# EAGLE board midipal-v02 (EAGLE 5.09)
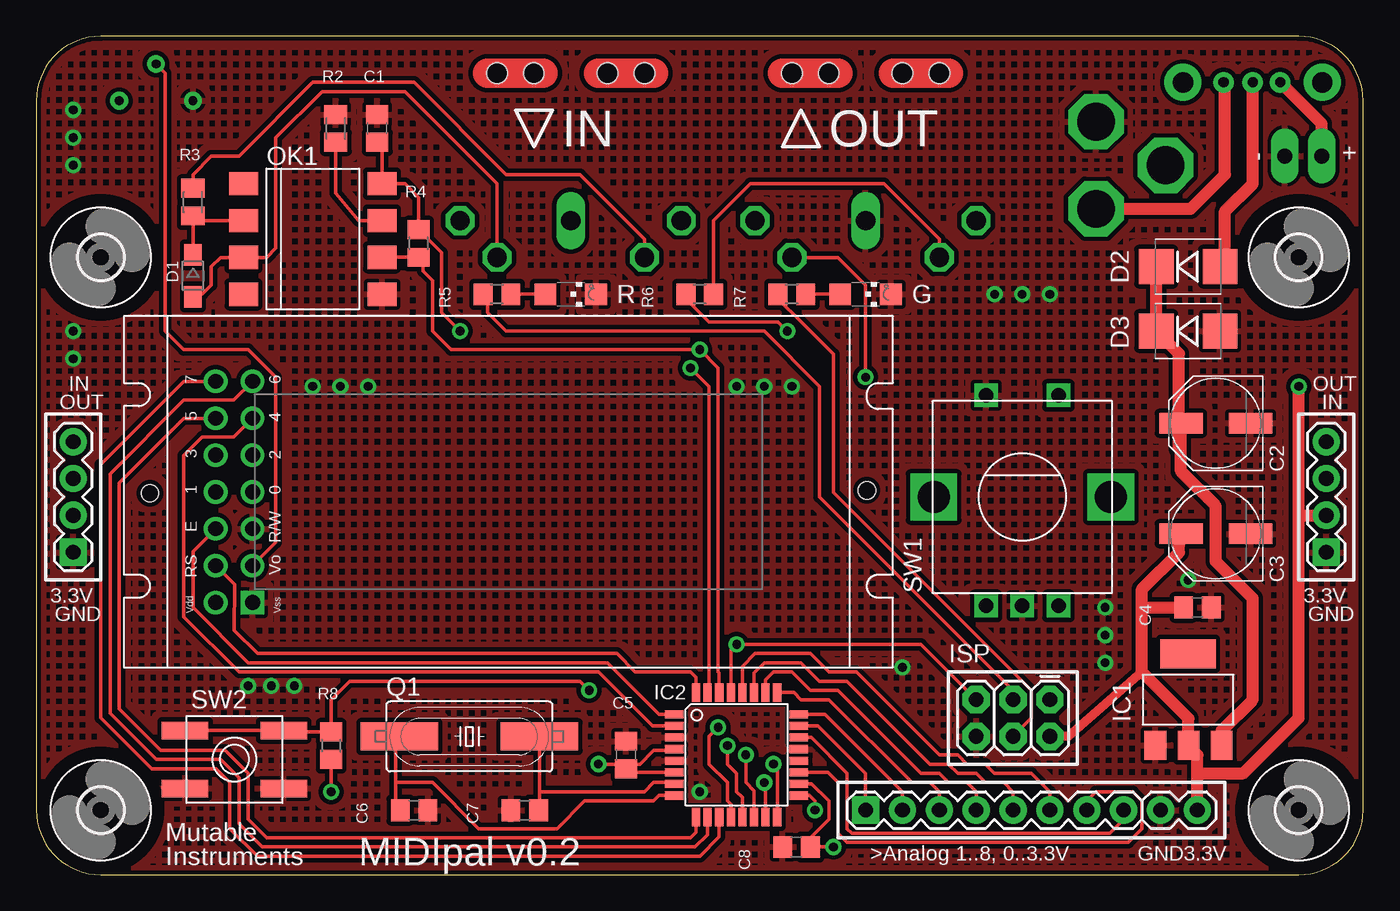
[diagram p0: board, top side]
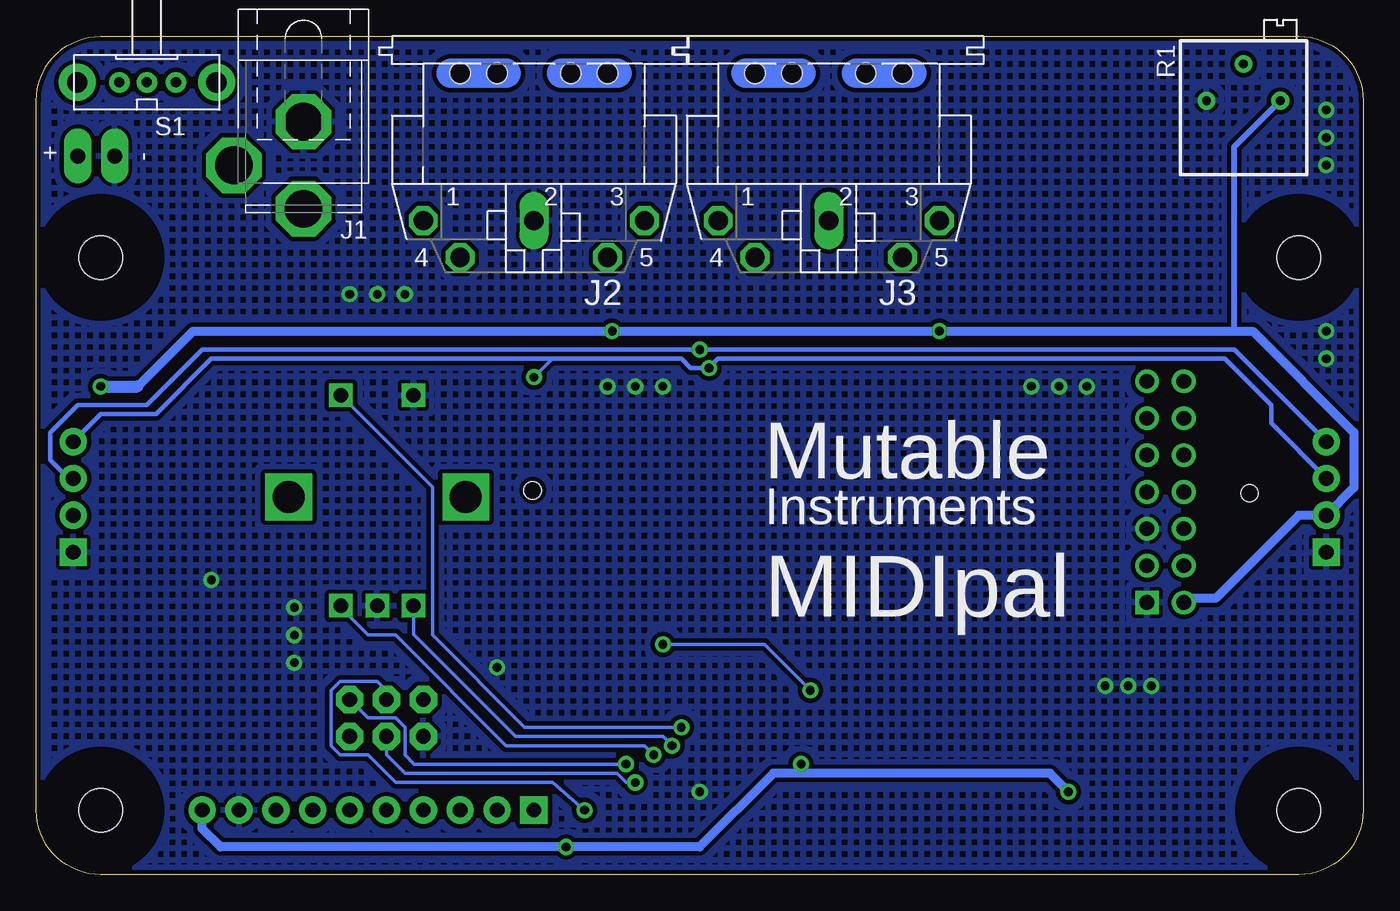
[diagram p1: board, bottom side, seen from below]

Size 91.44 x 57.79 mm. Coordinates in mm from the lower left corner, seen from the top.
Outline: 4.45,57.79 arc90 0,53.34 0,4.45 arc90 4.45,0 87,0 arc90 91.44,4.45 91.44,53.34 arc90 87,57.79 4.45,57.79
Copper layers (1*16): Top 0.035mm / dielectric 1.5mm / Bottom 0.035mm
Design rules "SparkFun": minimum track width 8mil, minimum drill 20mil, track to track 8mil, track to pad 8mil, pad to pad 8mil, via to via 8mil, smd to smd 8mil, copper to edge 10mil, drill to drill 8mil, minimum pad ring 12mil, minimum via ring 10mil, stop-mask expansion 4mil, vias tented up to drill 25mil, thermal gap 10mil

## Footprints (pad centres in the part's own frame; a part is rotated, then mirrored left to right if it is on the bottom)
C0805 = smd 1.3 x 1.5: 1 -0.95,0; 2 0.95,0
PANASONIC_D = smd 3 x 1.4: + 2.4,0; - -2.4,0
SOD323-W = smd 1.5 x 1.2: A 1.45,0; C -1.45,0
SMB-DIODE = smd 2.4 x 2.4: A 2.2,0; C -2.2,0
CHIPLED_1206 = smd 1.5 x 1.5: A 0,-1.75; C 0,1.75
SOT223 = smd 1.499 x 2.007: 1 -2.261,-3.15; 2 0.025,-3.15; 3 2.311,-3.15 | smd 3.81 x 2.007: 4 0,3.15
TQFP32-08 = smd 1.27 x 0.559: 1 -4.293,2.8; 2 -4.293,2; 3 -4.293,1.2; 4 -4.293,0.4; 5 -4.293,-0.4; 6 -4.293,-1.2; 7 -4.293,-2; 8 -4.293,-2.8; 17 4.293,-2.8; 18 4.293,-2; 19 4.293,-1.2; 20 4.293,-0.4; 21 4.293,0.4; 22 4.293,1.2; 23 4.293,2; 24 4.293,2.8 | smd 0.559 x 1.27: 9 -2.8,-4.293; 10 -2,-4.293; 11 -1.2,-4.293; 12 -0.4,-4.293; 13 0.4,-4.293; 14 1.2,-4.293; 15 2,-4.293; 16 2.8,-4.293; 25 2.8,4.293; 26 2,4.293; 27 1.2,4.293; 28 0.4,4.293; 29 -0.4,4.293; 30 -1.2,4.293; 31 -2,4.293; 32 -2.8,4.293
2X3 = drill 1.016 pad 1.88 octagon: 1 0,0; 2 0,2.54; 3 2.54,0; 4 2.54,2.54; 5 5.08,0; 6 5.08,2.54
SPC4078_BIG_HOLES = drill 2.6 pad 3.81 octagon: 1 -0.46,0; 2 2.54,-4.8; 3 5.54,0
MAB5SH = drill 1.321 octagon: 1 7.62,7.62; 3 -7.62,7.62; 4 5.08,10.16; 5 -5.08,10.16 | drill 1.321 long: 2 0,7.62 | hole 1.4: 2.54,-2.54; -2.54,-2.54; -5.08,-2.54; 5.08,-2.54
1X02_LONGPADS = drill 1.016 pad 1.88 long: 1 0,0; 2 2.54,0
1X04 = drill 1.016 pad 1.88 square: 1 0,0 | drill 1.016 pad 1.88 round: 2 2.54,0; 3 5.08,0; 4 7.62,0
1X08 = drill 1.016 pad 1.88 square: 1 0,0 | drill 1.016 pad 1.88 round: 2 2.54,0; 3 5.08,0; 4 7.62,0; 5 10.16,0; 6 12.7,0; 7 15.24,0; 8 17.78,0
1X02 = drill 1.016 pad 1.88 round: 1 0,0; 2 2.54,0
LCD_MODULE_1X8 = drill 1.016 square: 1 8.87,4.47 | drill 1.016 round: 2 6.33,4.47; 3 8.87,7.01; 4 6.33,7.01; 5 8.87,9.55; 6 6.33,9.55; 7 8.87,12.09; 8 6.33,12.09; 9 8.87,14.63; 10 6.33,14.63; 11 8.87,17.17; 12 6.33,17.17; 13 8.87,19.71; 14 6.33,19.71 | hole 1.2: 1.8,12; 51.2,12.2
DIL8-SMD = smd 1.6 x 2: 1 -3.81,-4.77; 2 -1.27,-4.77; 3 1.27,-4.77; 4 3.81,-4.77; 5 3.81,4.77; 6 1.27,4.77; 7 -1.27,4.77; 8 -3.81,4.77
HC49UP = smd 5.334 x 1.93: 1 -4.826,0; 2 4.826,0
RTRIM3296P = drill 0.61 round: 1 0,-2.54; 2 2.54,0; 3 0,2.54
M0805 = smd 1.3 x 1.6: 1 -0.95,0; 2 0.95,0
R0805 = smd 1.3 x 1.5: 1 -0.95,0; 2 0.95,0
EG1213 = drill 0.7 pad 1.422 round: 1 -2,0; 2 0,0; 3 1.9,0 | drill 1.4 pad 2.54 round: MT1 -4.8,0; MT2 4.8,0
ALPS_EC12E_SW = drill 1 square: A -2.5,-7.5; B 2.5,-7.5; C 0,-7.5; D -2.5,7; E 2.5,7 | drill 2.2 square: GND1 -6.1,0; GND2 6.1,0
EVQ-Q2 = smd 3.2 x 1.2: A -3.4,-2; A' 3.4,-2; B -3.4,2; B' 3.4,2
3,0 = hole 3: 0,0

## Placement (x,y rotation side)
C1  100n  [C0805]  23.5,51.44 90 top
C2  100u  [PANASONIC_D]  81.28,31.11 180 top
C3  100u  [PANASONIC_D]  81.28,23.49 180 top
C4  100n  [C0805]  80.01,18.41 0 top
C5  100n  [C0805]  40.64,8.26 90 top
C6  20p  [C0805]  26.04,4.45 180 top
C7  20p  [C0805]  33.65,4.45 0 top
C8  100n  [C0805]  52.39,1.91 180 top
D1  1N4148  [SOD323-W]  10.79,41.27 270 top
D2  [SMB-DIODE]  79.38,41.91 0 top
D3  [SMB-DIODE]  79.38,37.47 0 top
G  [CHIPLED_1206]  57.15,40.01 270 top
IC1  LM1117-3.3  [SOT223]  79.38,12.06 0 top
IC2  ATMEGA328  [TQFP32-08]  48.26,8.26 0 top
ISP  AVR_ISP  [2X3]  69.85,12.06 180 top
J1  [SPC4078_BIG_HOLES]  73.03,51.44 270 bottom
J2  MIDI  [MAB5SH]  57.15,52.71 180 bottom
J3  MIDI  [MAB5SH]  36.83,52.71 180 bottom
JP1  [1X02_LONGPADS]  86.04,49.53 0 top
JP2  [1X04]  2.54,22.22 90 top
JP3  [1X04]  88.9,22.22 90 top
JP4  [1X08]  57.15,4.45 0 top
JP5  [1X02]  77.47,4.45 0 top
LCD1  LCD_MODULE_NO_BKL  [LCD_MODULE_1X8]  6.03,14.29 0 top
OK1  6N138  [DIL8-SMD]  19.05,43.82 270 top
Q1  20MHz  [HC49UP]  29.84,9.53 0 top
R  [CHIPLED_1206]  36.83,40.01 270 top
R1  5k  [RTRIM3296P]  8.26,53.34 90 bottom
R2  4.7k  [M0805]  20.64,51.44 270 top
R3  220  [M0805]  10.79,46.36 270 top
R4  220  [R0805]  26.35,43.5 90 top
R5  100  [R0805]  31.75,40.01 180 top
R6  100  [R0805]  45.72,40.01 180 top
R7  100  [R0805]  52.07,40.01 180 top
R8  10k  [R0805]  20.32,8.89 270 top
S1  EG1213  [EG1213]  83.82,54.61 180 bottom
SW1  Encoder  [ALPS_EC12E_SW]  67.95,26.04 0 top
SW2  EVQQ2  [EVQ-Q2]  13.65,7.94 0 top
U$1  [3,0]  4.45,42.55 0 top
U$2  [3,0]  87,42.55 0 top
U$3  [SARASWATI]  57.15,17.78 0 bottom
U$4  [3,0]  4.45,4.45 0 top
U$5  [3,0]  87,4.45 0 top

## Library data of the parts
C1-C8 R1-R8 = rcl
D1 = diode
D2 D3 IC2 ISP JP1-JP5 = SparkFun
G R = led
IC1 = burr-brown
J1 = con-jack2
J2 J3 = og-midi
LCD1 = og-lcd
OK1 = og-optocouplers
Q1 = crystal
S1 SW2 = adafruit
SW1 = switch-alps
U$1 U$2 U$4 U$5 = holes
U$3 = og-pcb-art

## Nets
GND: C1.2 C2.- C3.- C4.2 C5.2 C6.1 C7.1 C8.2 D3.A G.C IC1.1 IC2.3 IC2.5 IC2.21 ISP.6 J1.1 J2.2 JP1.1 JP2.1 JP3.1 JP5.1 LCD1.1 LCD1.5 OK1.5 R1.3 R2.1 R.C SW1.C SW1.D SW2.A SW2.A'
LCD_DATA4: IC2.2 LCD1.11
LCD_DATA5: IC2.9 LCD1.12
LCD_DATA6: IC2.10 LCD1.13
LCD_DATA7: IC2.11 LCD1.14
LCD_EN: IC2.1 LCD1.6
LCD_RS: IC2.32 LCD1.4
MIDI_IN: IC2.30 JP2.4 JP3.3 OK1.6 R4.1
MIDI_OUT: IC2.31 J2.5 JP2.3 JP3.4
MISO: IC2.16 ISP.1
MOSI: IC2.15 ISP.4 R7.2
N$1: J1.3 S1.1
N$2: C2.+ D2.C D3.C IC1.3
N$3: IC2.23 JP4.1
N$4: D2.A S1.2
N$5: IC2.24 JP4.2
N$6: IC2.25 JP4.3
N$7: IC2.26 JP4.4
N$8: IC2.27 JP4.5
N$9: IC2.28 JP4.6
N$10: IC2.19 JP4.7
N$11: IC2.22 JP4.8
N$12: G.A R7.1
N$13: OK1.7 R2.2
N$14: R5.1 R.A
N$15: IC2.14 SW1.B
N$16: IC2.13 SW1.A
N$17: IC2.12 SW1.E
N$18: LCD1.3 R1.2
N$28: D1.C OK1.2 R3.2
N$68: J2.4 R6.1
N$72: J3.4 R3.1
N$73: D1.A J3.5 OK1.3
N$82: C6.2 IC2.8 Q1.1
N$83: C7.2 IC2.7 Q1.2
RESET: IC2.29 ISP.5 R8.1 SW2.B SW2.B'
SCK: IC2.17 ISP.3 R5.2
VCC: C1.1 C3.+ C4.1 C5.1 C8.1 IC1.2 IC2.4 IC2.6 IC2.18 ISP.2 JP2.2 JP3.2 JP5.2 LCD1.2 OK1.8 R1.1 R4.2 R6.2 R8.2
VIN: JP1.2 S1.3

## Tracks (layer width: path | path; a pad name or v marks a point on that pad's centre or on a via)
GND  (via drill 0.6)
  other vias: 79.38,20.32 45.72,5.71 59.69,14.29 73.66,18.41 73.66,16.51 73.66,14.61 14.61,13.02 16.19,13.02 17.78,13.02 48.26,33.66 2.54,52.71 2.54,50.8 2.54,48.9 2.54,37.47 2.54,35.56 66.04,40.01 67.95,40.01 69.85,40.01 22.86,33.66 20.96,33.66 19.05,33.66 50.16,33.66 52.07,33.66
  pour Top (isolate 0.305, hatched): -1.27,59.05 -1.27,-0.64 92.71,-0.64 92.71,59.05
  pour Bottom (isolate 0.305, hatched): -1.27,-0.64 92.71,-0.64 92.71,59.05 -1.27,59.05
LCD_DATA4
  Top 0.254: LCD1.11 13.61,30.16 11.43,30.16 10.16,28.89 10.16,17.78 13.97,13.97 38.73,13.97 42.45,10.26 IC2.2
LCD_DATA5
  Top 0.254: LCD1.12 12.34,31.43 10.16,31.43 5.71,26.99 5.71,11.43 8.57,8.57 13.02,8.57 14.61,6.99 14.61,3.81 15.88,2.54 45.08,2.54 45.46,2.92 IC2.9
LCD_DATA6
  Top 0.254: LCD1.13 13.61,32.7 10.16,32.7 5.08,27.62 5.08,11.11 8.26,7.94 12.7,7.94 13.97,6.67 13.97,3.49 15.56,1.91 45.4,1.91 46.26,2.76 IC2.10
LCD_DATA7
  Top 0.254: LCD1.14 11.7,33.97 10.16,33.97 4.45,28.26 4.45,10.79 7.94,7.3 12.38,7.3 13.34,6.35 13.34,3.17 15.24,1.27 45.72,1.27 47.06,2.61 IC2.11
LCD_EN
  Top 0.254: LCD1.6 10.79,22.27 10.79,18.41 14.61,14.61 39.37,14.61 42.92,11.05 IC2.1
LCD_RS
  Top 0.254: LCD1.4 13.66,20 13.65,16.83 15.24,15.24 40,15.24 41.27,13.97 45.08,13.97 45.46,13.6 IC2.32
MIDI_IN  (via drill 0.6)
  Top 0.254: OK1.6 R4.1 | R4.1 | R4.1 26.67,42.23 26.67,41.59 27.3,40.96 27.3,37.47 28.57,36.2 v45.72,36.2 46.99,34.93 46.99,13.97 47.06,13.9 IC2.30
  Bottom 0.305: JP2.4 8.89,36.2 v45.72,36.2 80.01,36.2 83.82,32.39 88.58,32.39 90.49,30.48 90.49,28.57 89.22,27.3 JP3.3
MIDI_OUT  (via drill 0.6)
  Top 0.254: IC2.31 46.35,12.64 46.35,33.66 v45.08,34.93 | J2.5 55.24,42.55 57.15,40.64 v57.15,34.29
  Bottom 0.254: 55.88,35.56 v57.15,34.29
  Bottom 0.305: JP2.3 6.35,31.11 6.35,32.39 9.53,35.56 44.45,35.56 v45.08,34.93 46.35,34.93 46.99,35.56 55.88,35.56 79.38,35.56 83.19,31.75 87,31.75 JP3.4
MISO  (via drill 0.6)
  Top 0.254: v50.8,7.62 51.06,7.36 IC2.16
  Bottom 0.254: ISP.1 68.58,10.79 66.67,10.79 66.04,10.16 66.04,8.26 65.41,7.62 v50.8,7.62
MOSI  (via drill 0.6)
  Top 0.254: ISP.4 68.58,10.79 68.58,12.7 54.93,26.35 54.93,35.88 52.39,38.41 51.43,39.37 R7.2 | v50.16,6.35 50.26,6.25 IC2.15
  Bottom 0.254: ISP.4 67.31,8.26 66.04,6.99 51.43,6.99 50.8,6.35 v50.16,6.35
N$1
  Top 0.813: S1.1 81.92,54.52 81.92,48.26 79.55,45.9 J1.3
N$2
  Top 0.813: IC1.3 81.69,9.93 83.82,12.06 83.82,19.05 81.28,21.59 81.28,25.4 78.88,27.8 C2.+ 78.74,29.35 78.74,35.9 D3.C D2.C
N$3
  Top 0.254: JP4.1 57.15,6.99 53.88,10.26 IC2.23
N$4
  Top 0.813: D2.A 81.92,41.62 81.92,45.72 83.82,47.62 S1.2
N$5
  Top 0.254: JP4.2 59.69,5.71 54.35,11.05 IC2.24
N$6
  Top 0.254: JP4.3 62.23,5.71 61.59,6.35 60.32,6.35 54.61,12.06 52.7,12.06 52.22,12.55 IC2.25
N$7
  Top 0.254: JP4.4 64.77,5.71 64.14,6.35 62.87,6.35 62.23,6.99 60.96,6.99 55.24,12.7 53.34,12.7 52.07,13.97 50.8,13.97 50.26,13.43 IC2.26
N$8
  Top 0.254: JP4.5 67.31,5.71 66.67,6.35 65.41,6.35 64.77,6.99 63.5,6.99 62.87,7.62 61.59,7.62 55.88,13.34 53.97,13.34 52.7,14.61 50.16,14.61 49.46,13.9 IC2.27
N$9
  Top 0.254: JP4.6 69.85,5.71 68.58,6.99 66.04,6.99 65.41,7.62 64.14,7.62 63.5,8.26 62.23,8.26 56.51,13.97 54.61,13.97 53.34,15.24 49.53,15.24 48.66,14.37 IC2.28
N$10
  Top 0.254: JP4.7 72.39,5.08 73.03,5.71 75.56,5.71 76.2,5.08 76.2,3.17 75.25,2.22 55.88,2.22 55.24,2.86 55.24,6.35 54.54,7.06 IC2.19
N$11
  Top 0.254: JP4.8 74.93,3.81 73.98,2.86 56.2,2.86 55.88,3.17 55.88,6.99 53.41,9.46 IC2.22
N$12
  Top 0.254: R7.1 G.A
N$13
  Top 0.254: R2.2 20.64,46.99 22.23,45.09 OK1.7
N$14
  Top 0.254: R5.1 R.A
N$15  (via drill 0.6)
  Top 0.254: v48.89,8.26 48.89,6.35 49.46,5.79 IC2.14
  Bottom 0.254: v48.89,8.26 49.53,8.89 59.05,8.89 66.67,16.51 68.58,16.51 70.45,18.38 SW1.B
N$16  (via drill 0.6)
  Top 0.254: v47.62,8.89 47.62,7.62 48.26,6.99 48.26,5.71 48.66,5.32 IC2.13
  Bottom 0.254: v47.62,8.89 48.26,9.53 58.42,9.53 65.45,16.55 SW1.A
N$17  (via drill 0.6)
  Top 0.254: v46.99,10.16 46.35,9.53 46.35,7.62 47.62,6.35 47.62,5.08 47.86,4.85 IC2.12
  Bottom 0.254: SW1.E 64.14,26.72 64.14,16.51 57.78,10.16 v46.99,10.16
N$18
  Top 0.254: LCD1.3 16.51,22.9 16.51,34.29 14.61,36.2 10.16,36.2 8.89,37.47 8.89,55.25 R1.2
N$28
  Top 0.254: D1.C R3.2 11.11,45.41 11.43,45.09 OK1.2
N$68
  Top 0.254: R6.1 46.67,45.09 49.21,47.62 58.42,47.62 62.23,43.82 J2.4
N$72
  Top 0.254: J3.4 41.91,43.82 37.46,48.26 32.38,48.26 26.04,54.61 19.05,54.61 13.97,49.53 12.07,49.53 10.79,48.26 R3.1
N$73
  Top 0.254: OK1.3 14.1,42.37 | J3.5 31.75,47.62 25.4,53.98 19.68,53.98 16.51,50.8 16.51,43.18 15.88,42.55 OK1.3 | D1.A 10.97,40.01 11.43,40.01 12.07,40.64 12.07,41.91 12.7,42.55 OK1.3
N$82
  Top 0.254: Q1.1 25.09,9.46 24.77,9.14 24.77,6.35 | 24.77,6.35 27.3,6.35 30.48,3.17 35.88,3.17 37.78,5.08 42.54,5.08 42.92,5.46 IC2.8 | 24.77,6.35 24.77,5.08 25.09,4.76 C6.2
N$83
  Top 0.254: C7.2 34.67,4.51 34.67,5.71 | 34.67,5.71 Q1.2 | IC2.7 43.87,6.35 42.54,6.35 41.91,5.71 34.67,5.71
RESET  (via drill 0.6)
  Top 0.254: SW2.B SW2.B' 15.88,9.84 R8.1 20.32,12.06 21.59,13.34 37.46,13.34 v38.1,12.7 | ISP.5 60.96,15.88 v48.26,15.88 47.86,15.47 IC2.29
  Bottom 0.254: v38.1,12.7 41.27,15.88 v48.26,15.88
SCK  (via drill 0.6)
  Top 0.254: R5.2 31.11,39.69 31.11,38.73 32.38,37.47 50.16,37.47 53.97,33.66 53.97,26.04 67.31,12.7 ISP.3 | v53.66,4.45 53.66,5.08 53.28,5.46 IC2.17
  Bottom 0.254: ISP.3 67.31,12.7 67.95,13.34 70.48,13.34 71.12,12.7 71.12,8.89 70.48,8.26 68.58,8.26 66.67,6.35 55.88,6.35 v53.66,4.45
VCC  (via drill 0.6)
  Top 0.254: C1.1 23.82,50.48 OK1.8 25.4,47.62 26.35,46.67 R4.2 27.94,42.86 27.94,38.73 v29.21,37.47 | 45.08,39.69 R6.2 44.77,39.69 46.35,38.1 51.12,38.1 v51.75,37.47 | C5.1 40.89,7.06 IC2.6 | IC2.4 43.88,8.57 42.54,8.57 41.59,7.62 40.96,7.62 C5.1 | C5.1 40.32,7.62 v38.73,7.62 | v20.32,5.71 R8.2 | IC2.18 53.43,6.25 54.61,5.08 54.61,3.81 53.34,2.54 C8.1 v54.93,1.91
  Top 0.61: 76.2,13.97 71.12,9.53 ISP.2
  Top 0.813: 76.2,18.41 76.2,13.97 79.4,10.77 IC1.2 80.01,8.26 80.01,6.99 | 76.2,18.41 76.2,19.68 78.74,22.22 78.74,22.72 C3.+ | 76.2,18.41 C4.1 | 87,24.76 v87,33.66 | 87,24.76 JP3.2 | JP5.2 80.01,6.99 | 87,24.76 87,10.79 83.19,6.99 80.01,6.99
  Bottom 0.254: 38.73,6.99 v38.73,7.62
  Bottom 0.406: 8.89,37.47 8.89,50.16 R1.1
  Bottom 0.61: 84.45,33.66 80.65,37.47 v51.75,37.47 v29.21,37.47 8.89,37.47 7.62,37.47 0.64,30.48 0.64,26.67 JP2.2 4.45,24.76 10.16,19.05 12.07,19.05 LCD1.2 | JP5.2 80.01,3.17 78.74,1.91 v54.93,1.91 45.72,1.91 40.64,6.99 38.73,6.99 21.59,6.99 v20.32,5.71
  Bottom 0.813: v87,33.66 84.45,33.66
VIN
  Top 0.813: S1.3 88.58,51.75 JP1.2

## Text on the board
tNames: IN | OUT | - | + | IN | OUT | OUT | IN | 3.3V | 3.3V | GND | GND | Mutable | >Analog 1..8, 0..3.3V | GND | 3.3V | Instruments | MIDIpal v0.2
bNames: - | + | Mutable | Instruments | MIDIpal